# EAGLE board FlatFeedMount_f1 (EAGLE 8.7.1)

Size 50 x 50 mm. Coordinates in mm from the lower left corner, seen from the top.
Outline: 0,0 0,50 50,50 50,0 0,0
Copper layers (1*16): Top 0.035mm / dielectric 1.5mm / Bottom 0.035mm
Design rules "default": minimum track width 6mil, minimum drill 0.35mm, track to track 6mil, track to pad 6mil, pad to pad 6mil, via to via 6mil, smd to smd 6mil, copper to edge 40mil, drill to drill 6mil, minimum pad ring 10mil, minimum via ring 8mil, stop-mask expansion 4mil, vias tented up to drill 0mil, thermal gap 10mil
Holes 8.75 mm at 25,25

## Footprints (pad centres in the part's own frame; a part is rotated, then mirrored left to right if it is on the bottom)
#4-40_BOLT_HOLE = hole 2.9: 0,0

## Placement (x,y rotation side)
E$1  [#4-40_BOLT_HOLE]  5,5 0 top
E$2  [#4-40_BOLT_HOLE]  5,45 0 top
E$3  [#4-40_BOLT_HOLE]  45,45 0 top
E$4  [#4-40_BOLT_HOLE]  45,5 0 top

## Library data of the parts
E$1-E$4 = Hinges

## Text on the board
tPlace: University of Washington | HuskySat-1 | HuskySat-1 | University of Washington